# Altium PCB microphone_DIY_top.PcbDoc
Units mm, origin at the board's own origin, x right, y up, seen from the top; angles counter-clockwise.
Board outline 40 x 40 mm, 2 copper layers (Top Layer, Bottom Layer); 20 components, 12 nets, 49 pads, 12 vias.
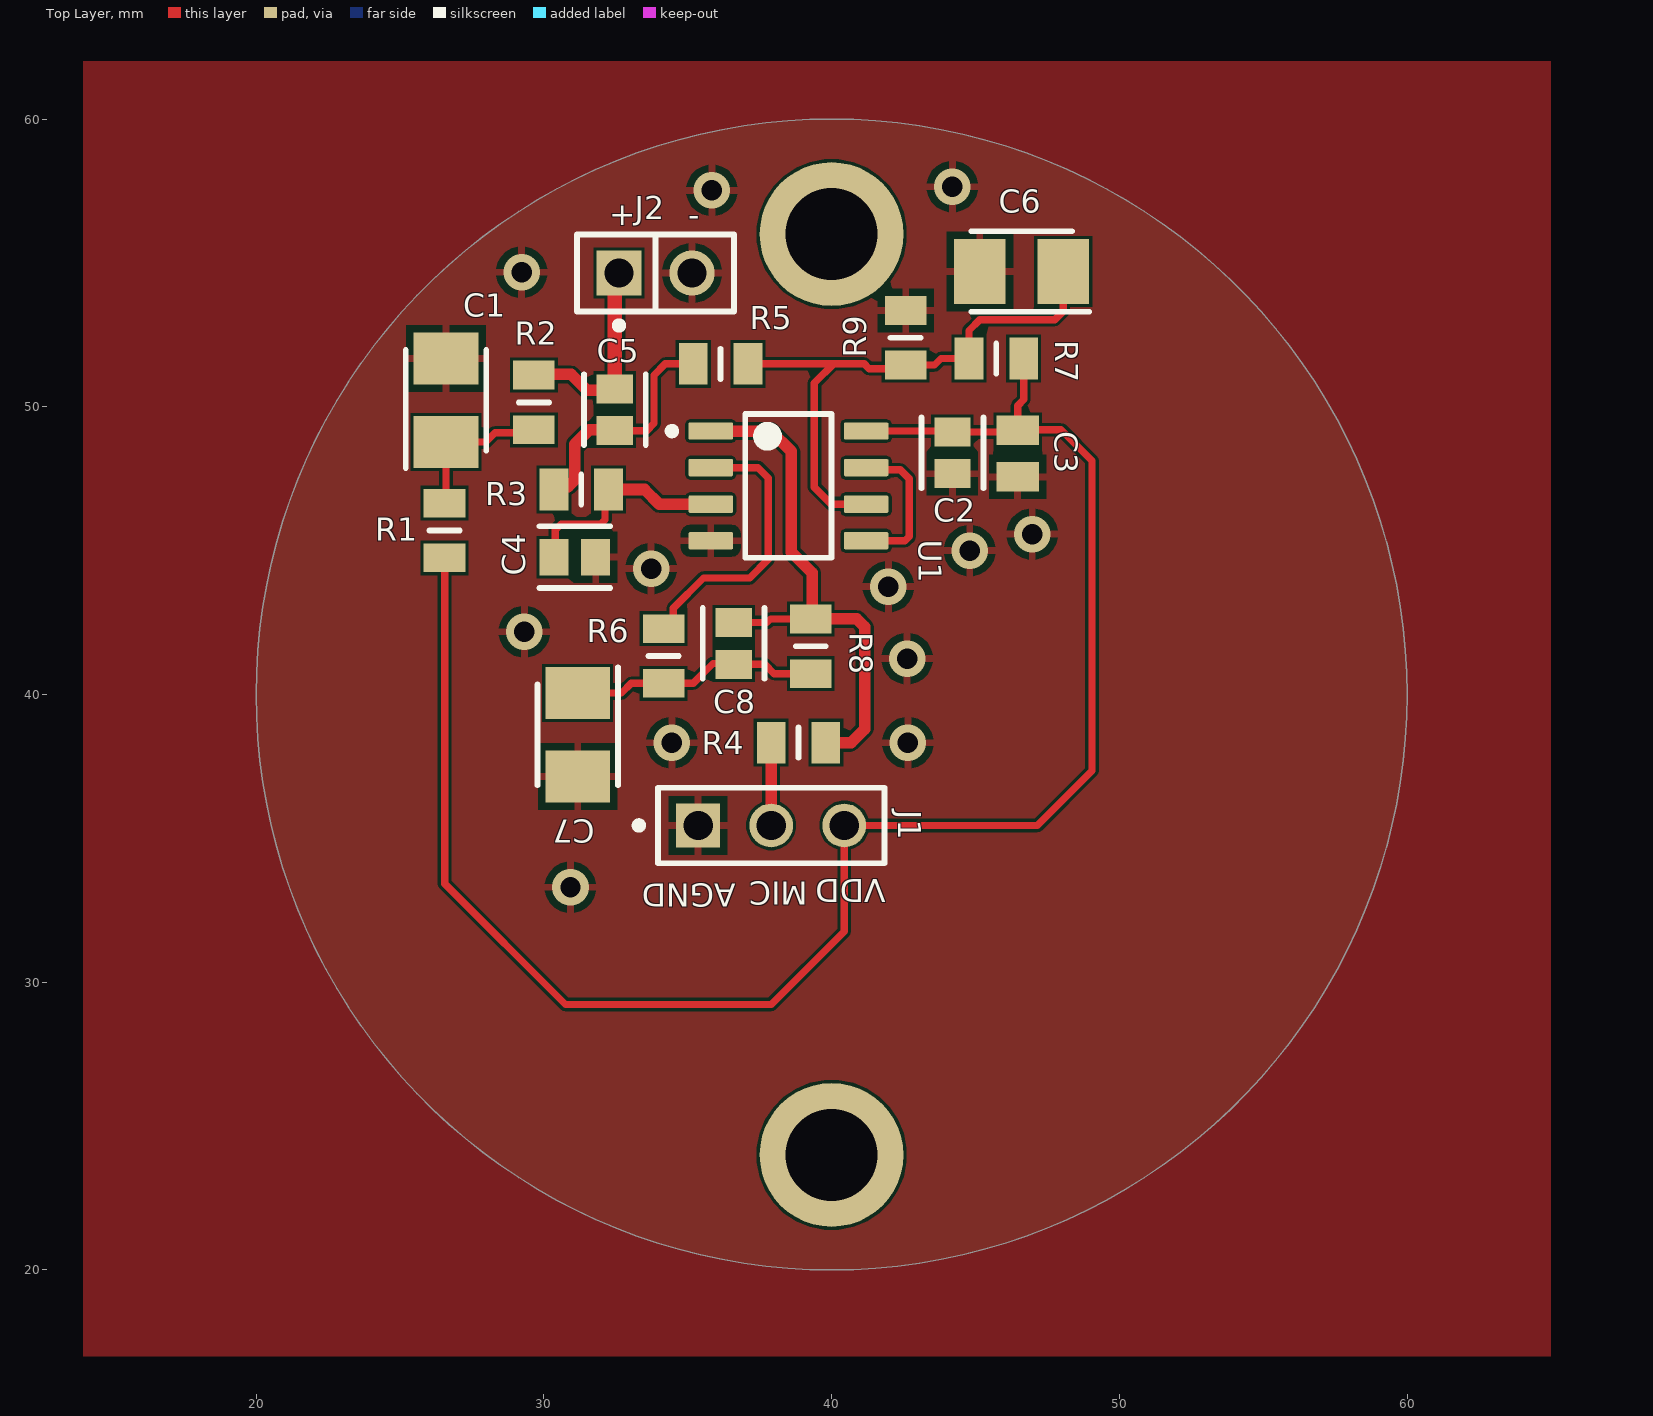
[diagram p0: Top Layer view]
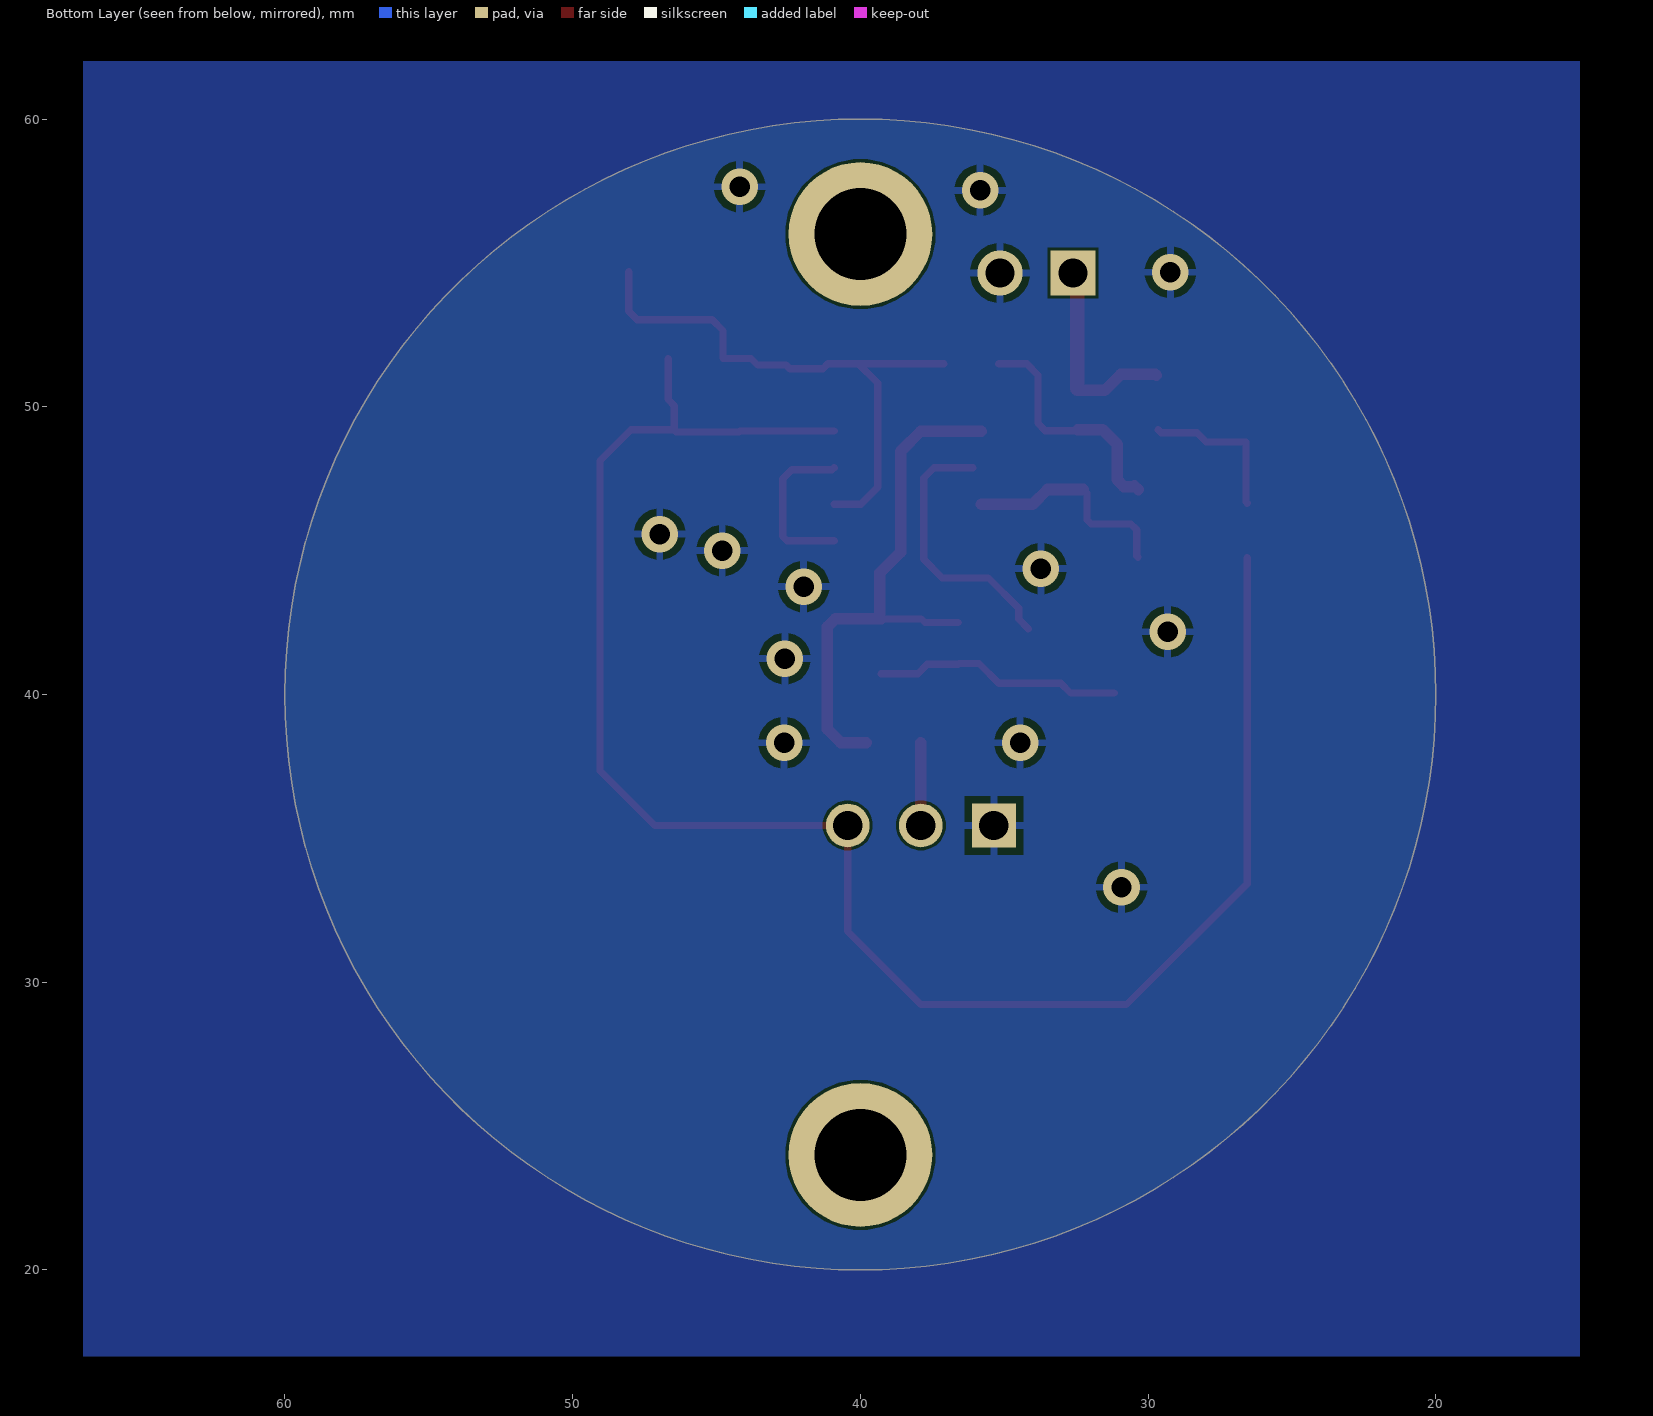
[diagram p1: Bottom Layer view, seen from below]
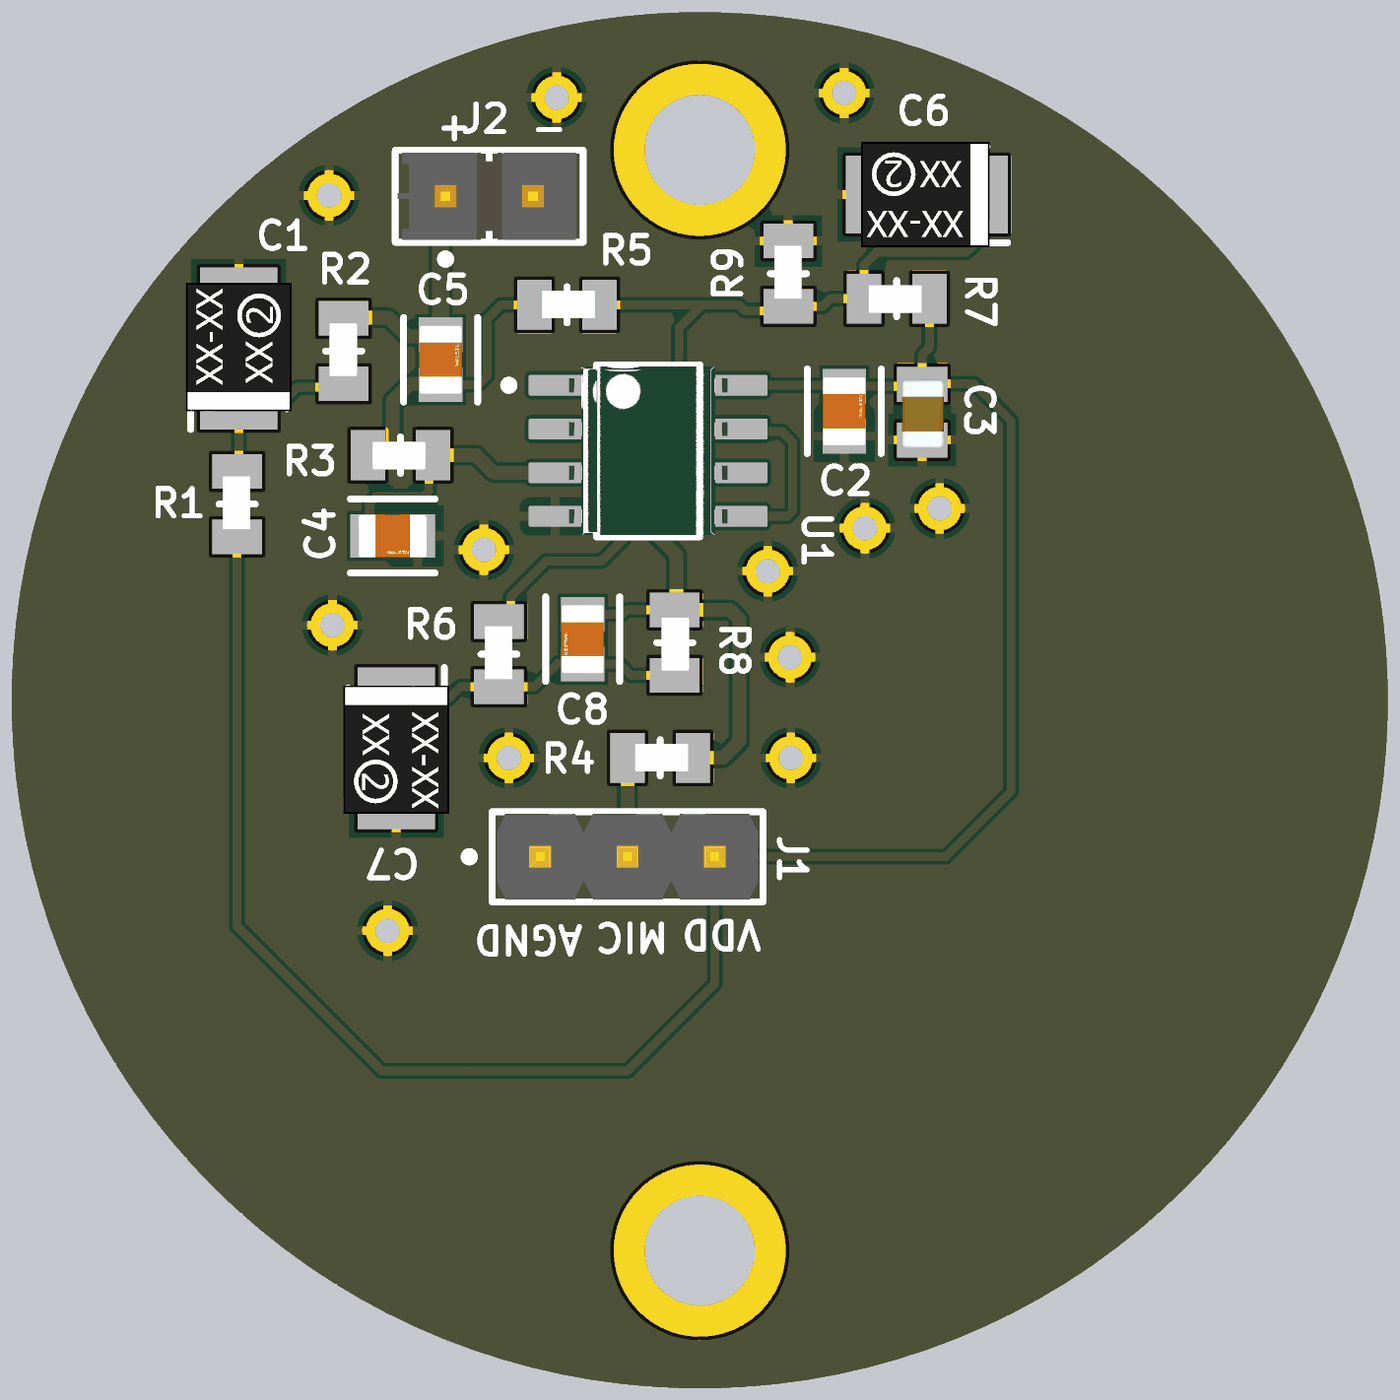
[diagram p2: 3D render of the assembled board from above, using the file's embedded part models]

## Layer stack, top to bottom
Top Solder: solder mask 0.0102, Solder Resist, Dk 3.5
Top Layer: signal copper 0.0356
Dielectric 1: dielectric 0.32, FR-4, Dk 4.8
Bottom Layer: signal copper 0.0356
Bottom Solder: solder mask 0.0102, Solder Resist, Dk 3.5

## Board outline
40,20 cw(c40,40) 20,40 cw(c40,40) 40,60 cw(c40,40) 60,40 cw(c40,40)

## Design rules (kind name [scope] priority, off if disabled: settings)
Clearance [All] p1: gap=0.1 ignorepadtopadclearanceinfootprint=FALSE
HoleSize [All] p1: absolutevalues=TRUE maxlimit=5 minlimit=0.025 maxpercent=80.000 minpercent=20.000
MinimumSolderMaskSliver [All] p1: minsoldermaskwidth=0.1
PolygonConnect [All] p1: connectstyle=Relief reliefconductorwidth=0.254 reliefentries=4 polygonreliefangle="90 Angle" airgapwidth=0.254
RoutingVias [All] p1: holewidth=0.711 width=1.27 viastyle="Through Hole" minholewidth=0.711 minwidth=1.27 maxholewidth=0.711 maxwidth=1.27
SilkToSilkClearance [All] p1: silktosilkclearance=0.01
SilkToSolderMaskClearance [IsPad] p1: minsilkscreentomaskgap=0.01 clearancetoexposedcopper=TRUE
SolderMaskExpansion [All] p1: expansion=0.102 istentingtop=FALSE
Width [All] p1: maxlimit=0.5 minlimit=0.254 preferedwidth=0.4 minimp=50.000000 maximp=50.000000 favimp=50.000000
26 further rules are at their usual default settings.

## Components (designator, comment, footprint, x,y, rotation, side; value= is the part's Value field where it differs from the comment)
C1 "593D106X9016B2TE3" 593D106X9016B2TE3-Footprint-1 26.6,50.225 r90 top value=10µF
C2 "0805B104K500CT" FP-0805B-IPC_C 44.2,48.4 r90 top
C3 "08055C105KAT2A" 08055C105KAT2A-Footprint-1 46.466,48.373 r90 top value=1µF
C4 "0805B104K500CT" FP-0805B-IPC_C 31.075,44.775 r0 top
C5 "0805B104K500CT" FP-0805B-IPC_C 32.468,49.897 r90 top
C6 "593D106X9016B2TE3" 593D106X9016B2TE3-Footprint-1 46.6,54.7 r180 top value=10µF
C7 "593D106X9016B2TE3" 593D106X9016B2TE3-Footprint-1 31.175,38.6 r270 top value=10µF
C8 "0805B104K500CT" FP-0805B-IPC_C 36.596,41.776 r270 top
J1 "MTLW-103-07-G-S-230" FP-MTLW-103-07-G-S-230-MFG 37.9,35.45 r0 top
J2 "TSW-102-14-G-S" FP-TSW-102-14-G-S-MFG 33.88,54.65 r0 top
R1 "AR05BTCW1501" AR05BTCW1501-Footprint-1 26.55,45.7 r90 top value=100
R2 "AR05BTCW1501" AR05BTCW1501-Footprint-1 29.65,50.15 r90 top value=2k2
R3 "AR05BTCW1501" AR05BTCW1501-Footprint-1 31.3,47.125 r180 top value=100
R4 "AR05BTCW1501" AR05BTCW1501-Footprint-1 38.85,38.325 r0 top value=100
R5 "AR05BTCW1501" AR05BTCW1501-Footprint-1 36.141,51.494 r0 top value=100K
R6 "AR05BTCW1501" AR05BTCW1501-Footprint-1 34.163,41.339 r90 top value=1.5k
R7 "AR05BTCW1501" AR05BTCW1501-Footprint-1 45.725,51.675 r180 top value=100K
R8 "AR05BTCW1501" AR05BTCW1501-Footprint-1 39.275,41.675 r270 top value=22k
R9 "AR05BTCW1501" AR05BTCW1501-Footprint-1 42.575,52.4 r90 top value=100K
U1 "TLV9062IDR" FP-D0008A-MFG 38.5,47.25 r0 top

## Footprints (in the part's own frame and the unit in brackets; to place one, negate y for a bottom-side part, rotate by r counter-clockwise, add the part's x,y. Pads: shape width x height; smd on the part's side, far side on the other; paste and mask are expansions set on the pad)
593D106X9016B2TE3-Footprint-1 [mm]
  rect 1.8x2.25 smd: 1(-1.45,0) 2(1.45,0)
  silkscreen extent -2.35,-1.4 1.75,1.4, body extent -1.83,-1.54 1.91,1.54, height 2.15
08055C105KAT2A-Footprint-1 [mm]
  rect 1.02x1.47 smd: 1(-0.81,0) 2(0.81,0)
  body extent -1.06,-0.64 0.95,0.61, height 1.4
AR05BTCW1501-Footprint-1 [mm]
  rect 1x1.45 smd: 1(-0.95,0) 2(0.95,0)
  silkscreen extent 0,-0.53 0,0.53, body extent -0.73,-0.39 0.82,0.41, height 0.45
FP-0805B-IPC_C [mm]
  rect 1.006x1.262 smd paste+0 mask+0: 1(-0.726,0) 2(0.726,0)
  silkscreen extent -1.23,-1.07 1.23,1.07, body extent -1.33,-0.77 1.33,0.77, height 0.25
FP-D0008A-MFG [mm]
  rrect17% 1.55x0.6 smd paste+0 mask+0: 1(-2.7,1.905) 2(-2.7,0.635) 3(-2.7,-0.635) 4(-2.7,-1.905) 5(2.7,-1.905) 6(2.7,-0.635) 7(2.7,0.635) 8(2.7,1.905)
  silkscreen extent -4.17,-2.5 1.5,2.5, body extent -3.57,-2.75 3.57,2.75, height 0.25
FP-MTLW-103-07-G-S-230-MFG [mm]
  rect 1.52x1.52 hole 1.02 paste-2539.97 mask+0: 1(-2.54,0)
  round 1.52 hole 1.02 paste-2539.97 mask+0: 2(0,0) 3(2.54,0)
  silkscreen extent -4.72,-1.31 3.94,1.31, body extent -4.04,-1.41 4.04,1.41, height 0.25
FP-TSW-102-14-G-S-MFG [mm]
  rect 1.57x1.57 hole 1.02 paste-2539.97 mask+0: 1(-1.27,0)
  round 1.57 hole 1.02 paste-2539.97 mask+0: 2(1.27,0)
  silkscreen extent -2.73,-1.95 2.73,1.34, body extent -2.83,-1.44 2.83,1.44, height 0.25

## Part data
C1 C6 C7: library part CMP-001-00089-1, "Cap Tant Solid 10uF 16V B CASE 10% (3.5 X 2.8 X 1.9mm) Inward L SMD 3528-21 0.8 Ohm 125C T/R", Case/Package=1411, Max Operating Temperature=125°C, Min Operating Temperature=-55°C, Ripple Current=132mA, Tolerance=10%, Voltage Rating=16V, Mounting Technology="Surface Mount", Pins=2
C2: library part CMP-45632-000003-1, "CAP CER 0.1UF 50V X7R 0805", Capacitance=100nF, Case Code (Imperial)=0805, Case Code (Metric)=2012, Dielectric=X7R, Max Operating Temperature=125°C, Min Operating Temperature=-55°C, Tolerance=10%, Voltage=50V, Case/Package=0805, Depth=1.25mm, Lead Free="Lead Free", Length=2mm, Packaging="Tape and Reel", Radiation Hardening=No, RoHS Compliant=Yes, Voltage Rating=50V, Voltage Rating (DC)=50V
C3: library part CMP-001-00087-1, "0805 Standard 1UF Ceramic Multilayer Capacitor, 50V, +125C, X7R Dielectric, +/-10%", Case/Package=0805, Max Operating Temperature=125°C, Min Operating Temperature=-55°C, Tolerance=10%, Voltage Rating=50V, Mounting Technology="Surface Mount"
C4: library part CMP-45632-000003-1, "CAP CER 0.1UF 50V X7R 0805", Capacitance=100pF, Case Code (Imperial)=0805, Case Code (Metric)=2012, Dielectric=X7R, Max Operating Temperature=125°C, Min Operating Temperature=-55°C, Tolerance=10%, Voltage=50V, Case/Package=0805, Depth=1.25mm, Lead Free="Lead Free", Length=2mm, Packaging="Tape and Reel", Radiation Hardening=No, RoHS Compliant=Yes, Voltage Rating=50V, Voltage Rating (DC)=50V
C5: library part CMP-45632-000003-1, "CAP CER 0.1UF 50V X7R 0805", Capacitance=47nF, Case Code (Imperial)=0805, Case Code (Metric)=2012, Dielectric=X7R, Max Operating Temperature=125°C, Min Operating Temperature=-55°C, Tolerance=10%, Voltage=50V, Case/Package=0805, Depth=1.25mm, Lead Free="Lead Free", Length=2mm, Packaging="Tape and Reel", Radiation Hardening=No, RoHS Compliant=Yes, Voltage Rating=50V, Voltage Rating (DC)=50V
C8: library part CMP-45632-000003-1, "CAP CER 0.1UF 50V X7R 0805", Capacitance=22pF, Case Code (Imperial)=0805, Case Code (Metric)=2012, Dielectric=X7R, Max Operating Temperature=125°C, Min Operating Temperature=-55°C, Tolerance=10%, Voltage=50V, Case/Package=0805, Depth=1.25mm, Lead Free="Lead Free", Length=2mm, Packaging="Tape and Reel", Radiation Hardening=No, RoHS Compliant=Yes, Voltage Rating=50V, Voltage Rating (DC)=50V
J1: library part CMP-02766-001679-1, "CONN HEADER VERT 3POS 2.54MM", Housing Color=Black, Max Current Rating=3A, Max Operating Temperature=125°C, Min Operating Temperature=-55°C, Contact Material=Bronze, Contact Plating=Gold, Depth=2.48mm, Gender=Male, Housing Material=Polymer, Length=7.62mm, Number of Contacts=3, Number of Rows=1, Orientation=Straight, Packaging=Bulk, Pitch=2.54mm, Radiation Hardening=No, RoHS Compliant=Yes, Termination=Solder
J2: library part CMP-02766-001740-1, "CONN HEADER VERT 2POS 2.54MM", Color=Black, Flammability Rating="UL94 V-0", Max Current Rating=7.6A, Max Operating Temperature=125°C, Max Voltage Rating (AC)=550V, Min Operating Temperature=-55°C, Package Quantity=1, Connector Type=Header, Contact Finish - Mating=GOLD, Contact Material=Bronze, Contact Mating Length=0.32inch, Contact Plating=Gold, Contact Shape=Square, Contact Type="Male Pin", Depth=2.54mm, Fastening Type=Pull, Gender=Male, Housing Color=Black, Housing Material=Polyester, Insulation Color=Black, Insulation Material=PBT, Lead Free="Lead Free", Length=5.08mm, Mount="Through Hole", Number of Contacts=2, Number of Positions=2, Number of Rows=1, Orientation=Straight, Packaging=Bulk, Pitch=2.54mm, Radiation Hardening=No, REACH SVHC="No SVHC", RoHS Compliant=Yes, Series=TSW, Termination=Solder, Width=2.54mm
R1 R2 R3 R4 R5 R6 R7 R8 R9: library part CMP-009-00182-1, "125mW Thin Film Resistor 100V ±25ppm/℃ ±0.1% 1.5kΩ 0805 Chip Resistor - Surface Mount ROHS", Case/Package=0805, Max Operating Temperature=155°C, Min Operating Temperature=-55°C, Tolerance=0.1%, Mounting Technology="Surface Mount"
U1: library part CMP-04895-000302-1, "IC CMOS 2 CIRCUIT 8SOIC", Case/Package=SOIC, Input Bias Current=0.5pA, Input Offset Voltage (Vos)=300uV, Max Operating Temperature=125°C, Min Operating Temperature=-40°C, Operating Supply Current=538uA, Output Current per Channel=50mA, Gain Bandwidth Product=10MHz, Mount="Surface Mount", Number of Channels=2, Number of Circuits=2, Number of Pins=8, Packaging="Tape and Reel", RoHS Compliant=Yes, Slew Rate=6.5V/µs

## Free pads (board coordinates)
  round 5 hole 3.2: 1(40,56) 2(40,24)

## Via types
v1: diameter 1.27, hole 0.711, Top Layer to Bottom Layer, 12 vias

## Nets (pads, with @x,y where several pads share a name; then routed paths per layer and width w, separated by ;. In a path a pad name is that pad's centre, name@x,y a point inside that pad or via, vN(x,y) a via of type N, cw(c..) or ccw(c..) an arc to the next point about the centre after c; other vN are vias at no path point)
AGNDC: C1.2 C2.1 C3.1 C4.2 C6.2 C7.2 J1.1 J2.2 R9.2 U1.4
  other v1: 30.925,33.3 34.45,38.325 42.65,38.325 42.625,41.25 29.322,42.182 41.975,43.75 33.725,44.375 44.8,45 46.975,45.575 29.225,54.675 35.839,57.521 44.2,57.65
BIAS: C6.1 R5.2 R7.2 R9.1 U1.6 | length 20.2
  Top Layer w0.254: R5.2 40.1,51.494 ; U1.6@40.914,46.615 39.99,46.615 39.4,47.205 39.4,50.825 40.069,51.494 40.1,51.494 ; C6.1 48.05,53.325 47.75,53.025 45.15,53.025 44.775,52.65 R7.2 43.8,51.675 43.575,51.45 R9.1 42.45,51.325 41.3,51.325 41.131,51.494 40.1,51.494
LDO_OUT: C2.2 C3.2 J1.3 R1.1 R7.1 U1.8 | length 63.1
  Top Layer w0.254: R1.1 26.55,33.425 30.75,29.225 37.9,29.225 40.44,31.765 J1.3 47.15,35.45 49.05,37.35 49.05,48.125 47.971,49.204 46.486,49.204 C3.2 ; U1.8@40.914,49.155 44.171,49.155 C2.2 46.408,49.126 C3.2 ; R7.1 46.675,50.25 46.466,50.041 C3.2
NetC1_1: C1.1 R1.2 R2.1 | length 5.4
  Top Layer w0.254: R1.2 26.6,46.7 C1.1 27.975,48.775 28.3,49.1 29.55,49.1 R2.1
NetC4_1: C4.1 R3.1 U1.3 | length 7.7
  Top Layer w0.254: C4.1 30.4,44.826 30.4,45.725 30.6,45.925 31.975,45.925 32.124,46.074 32.124,46.999 R3.1
  Top Layer w0.4: R3.1 33.5,47.125 34.01,46.615 U1.3
NetC5_1: C5.1 R3.2 R5.1 | length 8.4
  Top Layer w0.254: C5.1 33.571,49.171 33.825,49.425 33.825,51.1 34.219,51.494 R5.1
  Top Layer w0.4: R3.2 30.475,47.25 30.5,47.225 30.841,47.225 31.075,47.459 31.075,48.7 31.3,48.925 31.575,49.2 C5.1@32.44,49.2
NetC5_2: C5.2 J2.1 R2.2 | length 7.1
  Top Layer w0.4: R2.2@29.725,51.1 29.75,51.125 30.95,51.125 31.5,50.575 32.42,50.575 C5.2@32.445,50.6
  Top Layer w0.5: C5.2 32.468,54.422 32.425,54.465 J2.1
NetC7_1: C7.1 C8.2 R6.1 R8.2 | length 8.7
  Top Layer w0.254: C7.1 32.7,40.05 33.039,40.389 R6.1 35.189,40.389 35.875,41.075 36.571,41.075 C8.2 37.675,41.05 38,40.725 R8.2
NetC8_1: C8.1 R4.2 R8.1 U1.1 | length 19.1
  Top Layer w0.254: C8.1 37.752,42.502 37.875,42.625 R8.1
  Top Layer w0.4: U1.1 37.895,49.155 38.6,48.45 38.6,44.95 39.325,44.225 39.325,42.675 R8.1 40.875,42.625 41.15,42.35 41.15,38.8 40.675,38.325 R4.2
NetJ1_2: J1.2 R4.1 | length 2.9
  Top Layer w0.4: J1.2 R4.1
NetR6_2: R6.2 U1.2 | length 9.5
  Top Layer w0.254: R6.2 34.5,42.627 34.5,43 35.55,44.05 37.15,44.05 37.8,44.7 37.8,47.525 37.44,47.885 U1.2@36.086,47.885
NetU1_5: U1.5 U1.7 | length 5.8
  Top Layer w0.254: U1.5@40.914,45.345 42.551,45.345 42.7,45.494 42.7,47.5 42.385,47.815 40.984,47.815 U1.7@40.914,47.885

## Polygon pours and split planes (outlines as drawn)
AGNDC on Bottom Layer "AGNDC_L02_P000" (solid, pour order 0): 15,62 15,17 67,17 67,62
AGNDC on Top Layer "AGNDC_L01_P001" (solid, pour order 1): 14,62 14,17 65,17 65,62 63,62

## Silkscreen, mask and mechanical layers (free items; w line width, h text height)
Top Overlay:
  text "+" at 32.275,56.317 h0.8
  text "-" at 35.025,56.275 h0.8
  text "VDD" at 41.875,33.575 h0.8 r180
  text "MIC" at 39.175,33.5 h0.8 r180
  text "AGND" at 36.675,33.425 h0.8 r180
Mechanical 1:
  circle w0.254: c40,40 r20